# EAGLE board F7_250x185 (EAGLE 6.1)
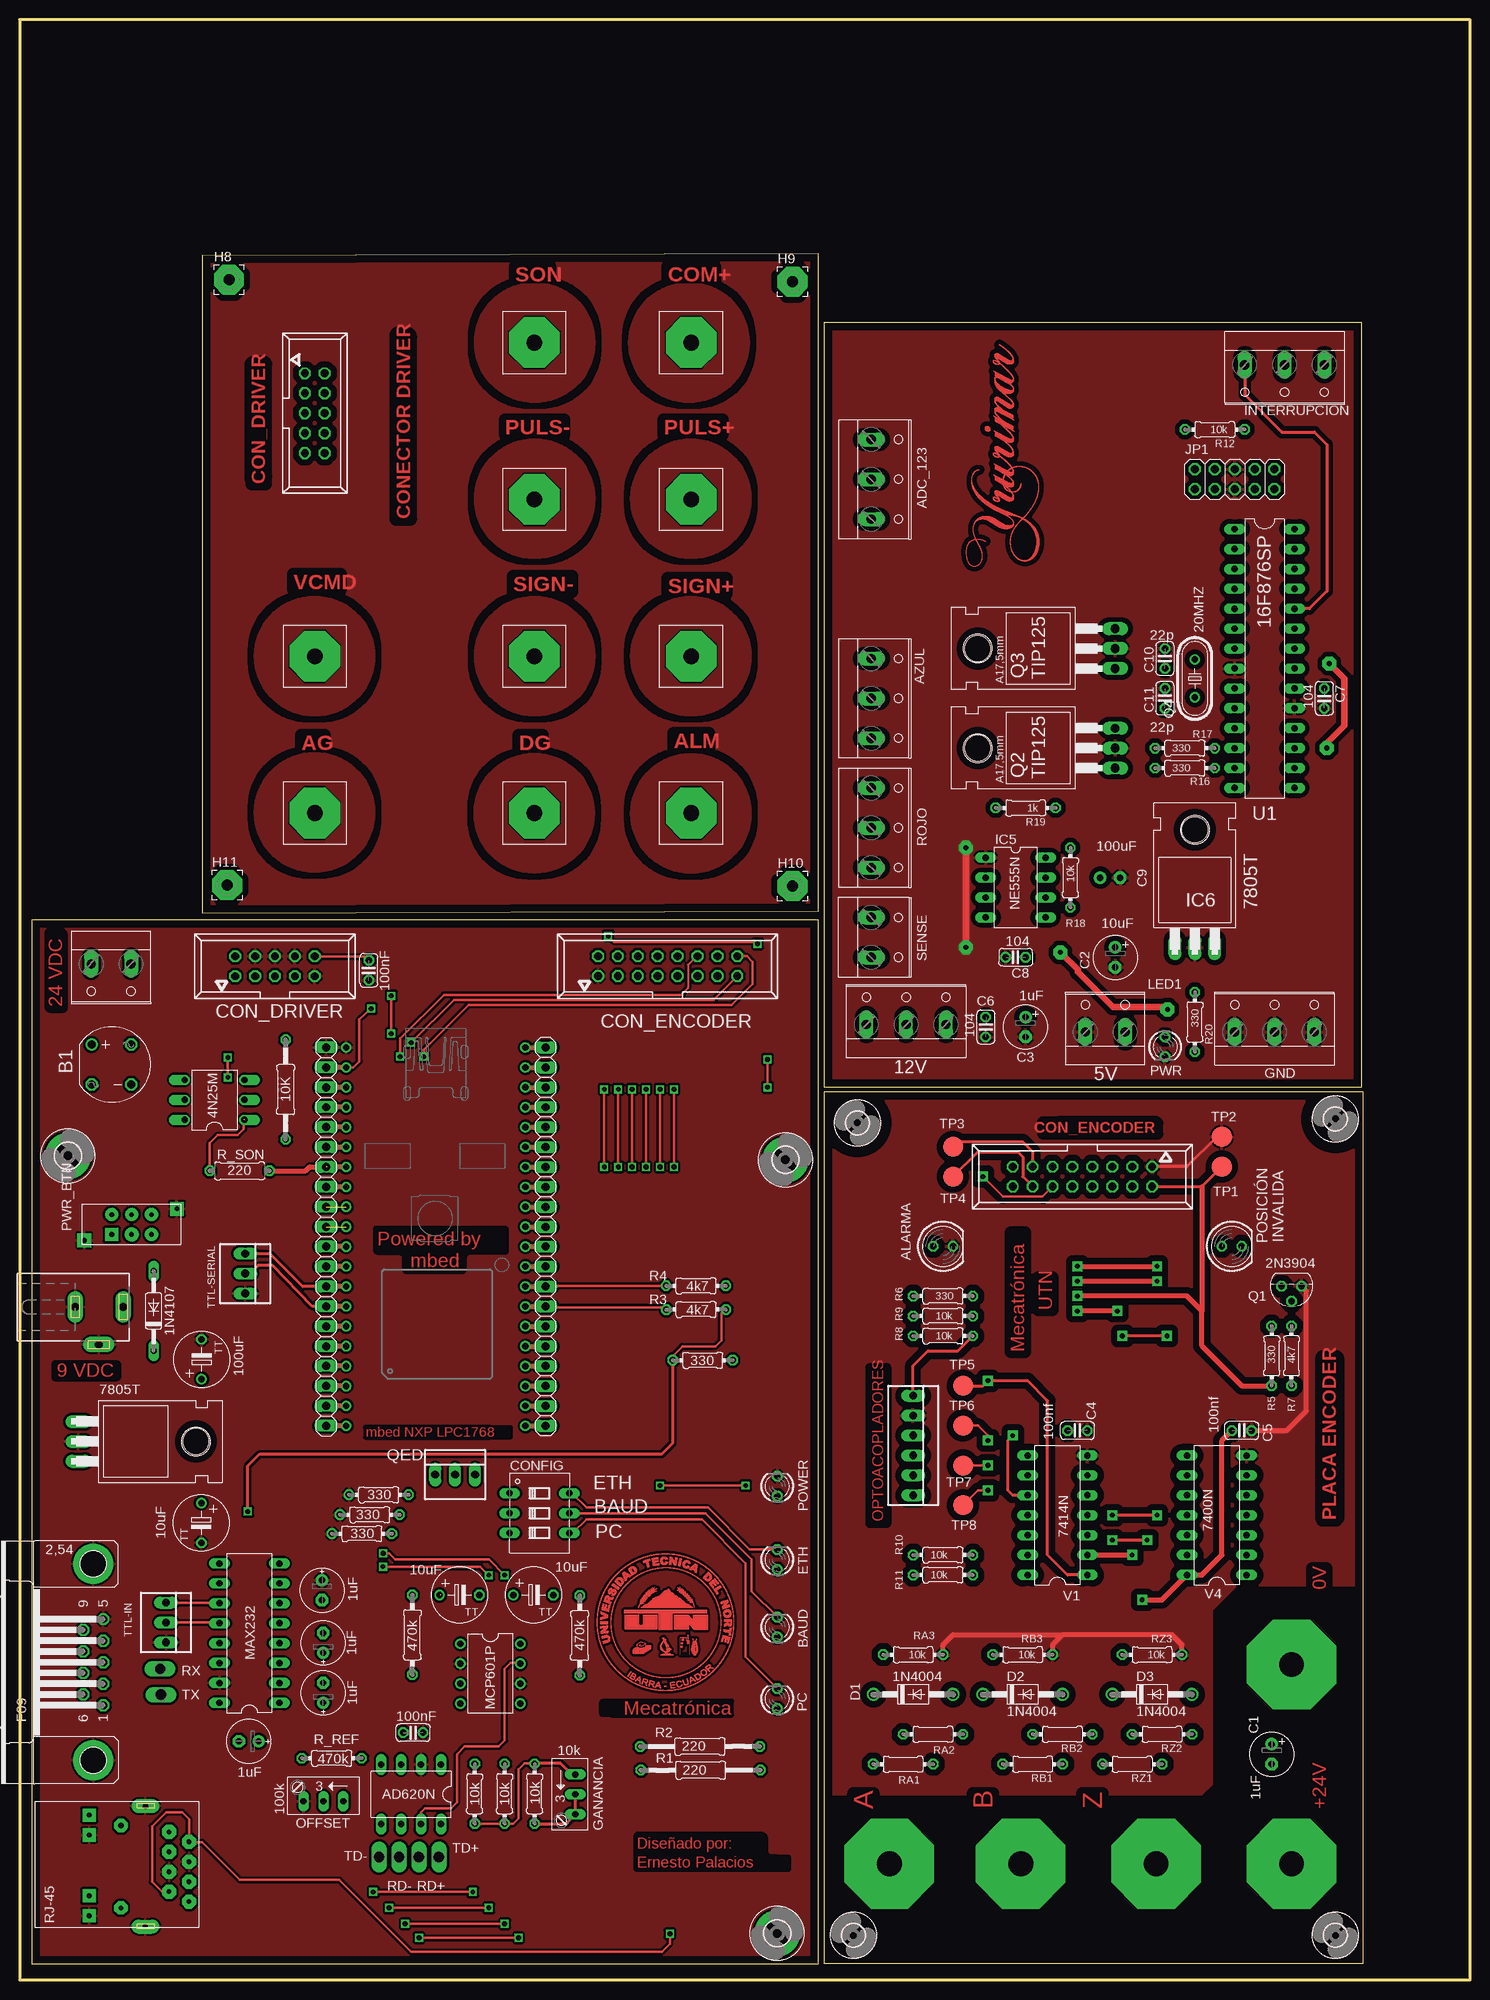
[diagram p0: board, top side]
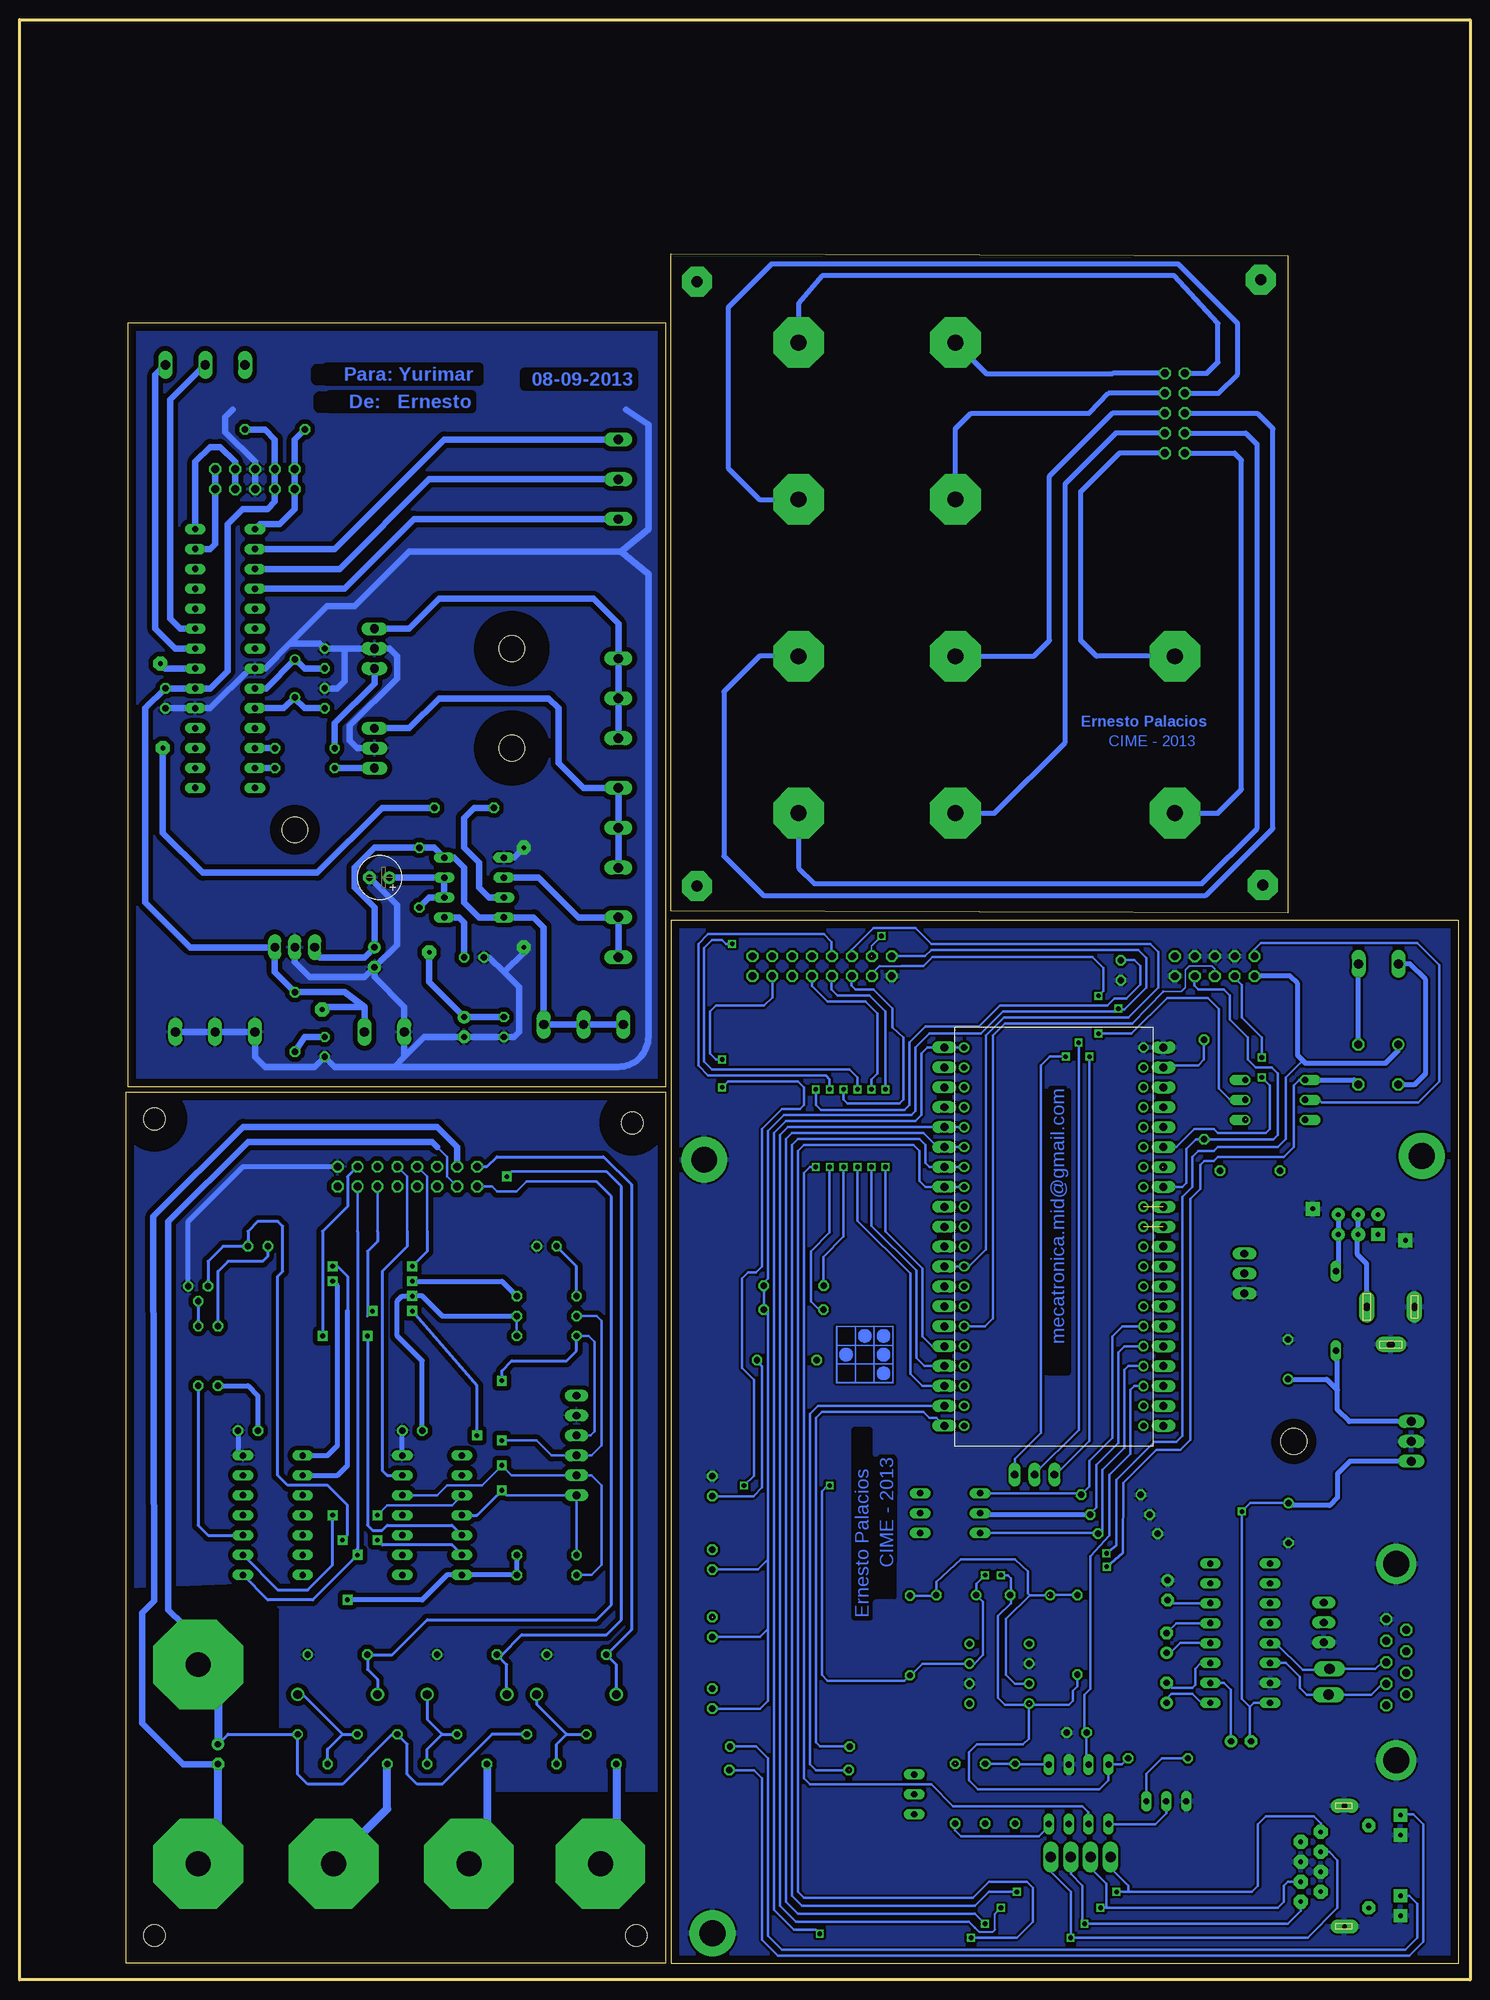
[diagram p1: board, bottom side, seen from below]

Size 185 x 250 mm. Coordinates in mm from the lower left corner, seen from the top.
Outline: 0,0 185,0 185,250 0,250 0,0
Outline: 1.54,2.05 101.87,2.05 101.87,135.15 1.54,135.15 1.54,2.05
Outline: 171.37,2.11 171.37,113.22 102.61,113.22 102.61,2.11 171.37,2.11
Outline: 23.27,136.06 101.89,136.31 101.89,220.13 23.27,219.88 23.27,136.06
Outline: 171.17,113.91 171.17,211.36 102.6,211.36 102.6,113.91 171.17,113.91
Copper layers (1*16): Top 0.035mm / dielectric 1.5mm / Bottom 0.035mm
Design rules: minimum track width 10mil, minimum drill 24mil, track to track 8mil, track to pad 8mil, pad to pad 8mil, via to via 8mil, smd to smd 8mil, copper to edge 40mil, drill to drill 8mil, minimum pad ring 10mil, minimum via ring 8mil, stop-mask expansion 4mil, vias tented up to drill 0mil, thermal gap 10mil
Net classes: 1 fuente_24: width 0.406 mm, clearance 0.305 mm; 3 fuente_5v: width 0.356 mm; 4 tierra_5v: width 0.356 mm
Milling: 8 lines

## Footprints (pad centres in the part's own frame; a part is rotated, then mirrored left to right if it is on the bottom)
BANA_PLUG = drill 3.175 pad 11.43 octagon: P$1 0,0
DCJ0303 = drill 1 pad 2 long: 1 0,3.1; 2 4.8,0; 3 0,-3
W237-133 = drill 1.194 long: 1 -5.08,-0.635; 2 0,-0.635; 3 5.08,-0.635
W237-132 = drill 1.194 long: 1 -2.54,-0.635; 2 2.54,-0.635
BANANA = drill 2 pad 6.452 octagon: BANANA$1 0,0
LED5MM = drill 0.813 octagon: A -1.27,0; K 1.27,0
RB1A = drill 1.016: + -2.54,2.54 | drill 1.016 octagon: - 2.54,-2.54; AC1 2.54,2.54; AC2 -2.54,-2.54
LED3MM = drill 0.813 octagon: A -1.27,0; K 1.27,0
E2,5-6 = drill 0.813 pad 1.6: + -1.27,0 | drill 0.813 pad 1.6 octagon: - 1.27,0
TT5D7 = drill 0.813: + -2.54,0 | drill 0.813 octagon: - 2.54,0
E2,5-6E = drill 0.813 pad 1.575: + -1.27,0 | drill 0.813 pad 1.575 octagon: - 1.27,0
C025-024X044 = drill 0.813 octagon: 1 -1.27,0; 2 1.27,0
057-010-1 = drill 1 octagon: 1 -5.08,-1.27; 2 -5.08,1.27; 3 -2.54,-1.27; 4 -2.54,1.27; 5 0,-1.27; 6 0,1.27; 7 2.54,-1.27; 8 2.54,1.27; 9 5.08,-1.27; 10 5.08,1.27
057-016-1 = drill 1 octagon: 1 -8.89,-1.27; 2 -8.89,1.27; 3 -6.35,-1.27; 4 -6.35,1.27; 5 -3.81,-1.27; 6 -3.81,1.27; 7 -1.27,-1.27; 8 -1.27,1.27; 9 1.27,-1.27; 10 1.27,1.27; 11 3.81,-1.27; 12 3.81,1.27; 13 6.35,-1.27; 14 6.35,1.27; 15 8.89,-1.27; 16 8.89,1.27
DIP03YL = drill 0.813 long: 1 -2.54,-3.81; 2 0,-3.81; 3 2.54,-3.81; 4 2.54,3.81; 5 0,3.81; 6 -2.54,3.81
DO41-10 = drill 1.118: A 5.08,0; C -5.08,0
DO35-10 = drill 0.813 long: A 5.08,0; C -5.08,0
RJ9W = drill 0.813 long: A 2.54,0.635; E -2.54,0.635; S 0,0.635
3,3-PAD = drill 3.3 pad 5.842: B3,3 0,0
2,8 = hole 2.8: 0,0
3,81/1,4 = drill 1.397 pad 3.81 octagon: 1 0,0
DIL16 = drill 0.813 long: 1 -8.89,-3.81; 2 -6.35,-3.81; 3 -3.81,-3.81; 4 -1.27,-3.81; 5 1.27,-3.81; 6 3.81,-3.81; 7 6.35,-3.81; 8 8.89,-3.81; 9 8.89,3.81; 10 6.35,3.81; 11 3.81,3.81; 12 1.27,3.81; 13 -1.27,3.81; 14 -3.81,3.81; 15 -6.35,3.81; 16 -8.89,3.81
TO220H = drill 1.118 long: 1 -2.54,-10.16; 2 0,-10.16; 3 2.54,-10.16 | hole 3.302: 0,4.826
DIL08 = drill 0.813 pad 1.27: 1 -3.81,-3.81; 2 -1.27,-3.81; 3 1.27,-3.81; 4 3.81,-3.81; 5 3.81,3.81; 6 1.27,3.81; 7 -1.27,3.81; 8 -3.81,3.81
DIL08' = drill 0.813 long: 1 -3.81,-3.81; 2 -1.27,-3.81; 3 1.27,-3.81; 4 3.81,-3.81; 5 3.81,3.81; 6 1.27,3.81; 7 -1.27,3.81; 8 -3.81,3.81
2X05 = drill 1.016 octagon: 1 -5.08,-1.27; 2 -5.08,1.27; 3 -2.54,-1.27; 4 -2.54,1.27; 5 0,-1.27; 6 0,1.27; 7 2.54,-1.27; 8 2.54,1.27; 9 5.08,-1.27; 10 5.08,1.27
1X20 = drill 1.016 long: 1 -24.13,0; 2 -21.59,0; 3 -19.05,0; 4 -16.51,0; 5 -13.97,0; 6 -11.43,0; 7 -8.89,0; 8 -6.35,0; 9 -3.81,0; 10 -1.27,0; 11 1.27,0; 12 3.81,0; 13 6.35,0; 14 8.89,0; 15 11.43,0; 16 13.97,0; 17 16.51,0; 18 19.05,0; 19 21.59,0; 20 24.13,0
MBED-KIT = drill 0.8: D+ 11.43,1.27; D- 11.43,3.81; GND -11.43,24.13; IF+ 11.43,16.51; IF- 11.43,19.05; NR -11.43,16.51; P$5 -11.43,13.97; P$6 -11.43,11.43; P$7 -11.43,8.89; P$8 -11.43,6.35; P$9 -11.43,3.81; P$10 -11.43,1.27; P$11 -11.43,-1.27; P$12 -11.43,-3.81; P$13 -11.43,-6.35; P$14 -11.43,-8.89; P$15 -11.43,-11.43; P$16 -11.43,-13.97; P$17 -11.43,-16.51; P$18 -11.43,-19.05; P$19 -11.43,-21.59; P$20 -11.43,-24.13; P$21 11.43,-24.13; P$22 11.43,-21.59; P$23 11.43,-19.05; P$24 11.43,-16.51; P$25 11.43,-13.97; P$26 11.43,-11.43; P$27 11.43,-8.89; P$28 11.43,-6.35; P$29 11.43,-3.81; P$30 11.43,-1.27; RD+ 11.43,11.43; RD- 11.43,13.97; TD+ 11.43,6.35; TD- 11.43,8.89; VB -11.43,19.05; VIN -11.43,21.59; VOUT 11.43,24.13; VU 11.43,21.59
DIL06 = drill 0.813 offset: 1 -2.54,-3.81; 2 0,-3.81; 3 2.54,-3.81; 4 2.54,3.81; 5 0,3.81; 6 -2.54,3.81
BOTON_ENCNEDIDO = drill 0.6 pad 1.778 square: G1 -2.019,6.039; G2 2.018,-5.785 | drill 0.6 pad 1.676 square: P1 -1.27,2.54 | drill 0.6 pad 1.778: P2 -1.27,0 | drill 0.6 pad 1.676: P3 -1.27,-2.54; P4 1.27,-2.54; P5 1.27,0; P6 1.27,2.54
22-23-2061 = drill 1 long: 1 -6.35,0; 2 -3.81,0; 3 -1.27,0; 4 1.27,0; 5 3.81,0; 6 6.35,0
0204/7 = drill 0.813 octagon: 1 -3.81,0; 2 3.81,0
TO92 = drill 0.813 octagon: 1 1.27,0; 2 0,1.905; 3 -1.27,0
TO220 = drill 1.118 long: 1 -2.54,-6.35; 2 0,-6.35; 3 2.54,-6.35 | hole 3.302: 0,11.176
HC49/S = drill 0.813: 1 -2.413,0; 2 2.413,0
22-23-2031 = drill 1 long: 1 -2.54,0; 2 0,0; 3 2.54,0
0207/15 = drill 0.813 octagon: 1 -7.62,0; 2 7.62,0
0207/10 = drill 0.813 octagon: 1 -5.08,0; 2 5.08,0
0207/12 = drill 0.813 octagon: 1 -6.35,0; 2 6.35,0
0207/7 = drill 0.813 octagon: 1 -3.81,0; 2 3.81,0
P1-13Y = drill 1.321 pad 1.905 long: TP 0,0
B2,54 = smd 2.54 x 2.54: TP 0,0
DIL28-3 = drill 0.813 long: 1 -16.51,-3.81; 2 -13.97,-3.81; 3 -11.43,-3.81; 4 -8.89,-3.81; 5 -6.35,-3.81; 6 -3.81,-3.81; 7 -1.27,-3.81; 8 1.27,-3.81; 9 3.81,-3.81; 10 6.35,-3.81; 11 8.89,-3.81; 12 11.43,-3.81; 13 13.97,-3.81; 14 16.51,-3.81; 15 16.51,3.81; 16 13.97,3.81; 17 11.43,3.81; 18 8.89,3.81; 19 6.35,3.81; 20 3.81,3.81; 21 1.27,3.81; 22 -1.27,3.81; 23 -3.81,3.81; 24 -6.35,3.81; 25 -8.89,3.81; 26 -11.43,3.81; 27 -13.97,3.81; 28 -16.51,3.81
RJ45-GENERIC = drill 0.6 pad 1.778 octagon: P1 12.2,19.685; P2 10.93,17.145; P3 9.66,19.685; P4 8.39,17.145; P5 7.12,19.685; P6 5.85,17.145; P7 4.58,19.685; P8 3.31,17.145 | drill 0.6 pad 1.676 square: PAAMA 1.17,6.958; PAV 11.465,6.958; PKAM 3.71,6.958; PKV 14.005,6.958 | drill 0.6 pad 1.778 long: PSHIEL2 15.375,14.105 | drill 0.7 pad 1.778 long: PSHIELD1 0,14.105 | drill 0.7 pad 1.676 octagon: PSTAND 2.5,11.008 | drill 0.6 pad 1.676 octagon: PSTAND2 13,11.008
DIL14 = drill 0.813 long: 1 -7.62,-3.81; 2 -5.08,-3.81; 3 -2.54,-3.81; 4 0,-3.81; 5 2.54,-3.81; 6 5.08,-3.81; 7 7.62,-3.81; 8 7.62,3.81; 9 5.08,3.81; 10 2.54,3.81; 11 0,3.81; 12 -2.54,3.81; 13 -5.08,3.81; 14 -7.62,3.81
F09HP = drill 1.016 octagon: 1 -5.486,-1.27; 2 -2.743,-1.27; 3 0,-1.27; 4 2.743,-1.27; 5 5.486,-1.27; 6 -4.115,1.27; 7 -1.372,1.27; 8 1.372,1.27; 9 4.115,1.27 | drill 3.302 pad 5.08: G1 -12.522,0; G2 12.522,0

## Placement (x,y rotation side)
0V  BANA-PCBOARD-CONNECTOR  [BANA_PLUG]  162.23,40.21 90 top
9VDC  [DCJ0303]  10.1,85.82 270 top
12V  [W237-133]  113.07,122.48 0 top
24  BANA-PCBOARD-CONNECTOR  [BANA_PLUG]  162.23,14.81 90 top
24V  [W237-132]  11.67,128.93 180 top
A  BANA-PCBOARD-CONNECTOR  [BANA_PLUG]  110.92,14.81 90 top
ADC_123  [W237-133]  109.26,191.38 270 top
AG  BANANA  [BANANA]  37.65,148.81 0 top
ALARMA  [LED5MM]  117.78,93.55 0 top
ALM  BANANA  [BANANA]  85.65,148.81 0 top
AZUL  [W237-133]  109.26,163.44 270 top
B  BANA-PCBOARD-CONNECTOR  [BANA_PLUG]  127.68,14.81 90 top
B1  [RB1A]  11.72,116.75 0 top
BAUD  [LED3MM]  96.65,45 90 top
C1  1uF  [E2,5-6]  159.69,28.78 270 top
C1_9V  100uF  [TT5D7]  23.21,79.15 90 top
C1_+24  10uF  [TT5D7]  65.53,49.09 0 top
C1_MAX  1uF  [E2,5-6E]  38.71,36.61 90 top
C2  10uF  [E2,5-6]  139.74,130.42 270 top
C2_0V  10uF  [TT5D7]  56.1,49.08 0 top
C2_9V  10uF  [TT5D7]  23.18,58.28 270 top
C2_MAX  1uF  [E2,5-6E]  38.71,42.98 90 top
C3  1uF  [E2,5-6]  128.31,121.53 270 top
C3_AOUT  100nF  [C025-024X044]  44.54,128.76 270 top
C3_MAX  1uF  [E2,5-6E]  38.56,49.69 270 top
C4  100nf  [C025-024X044]  134.92,70.06 0 top
C4_MAX  1uF  [E2,5-6E]  29.23,30.42 180 top
C5  100nf  [C025-024X044]  155.88,70.06 0 top
C5_AOUT  100nF  [C025-024X044]  50.2,31.54 0 top
C6  104  [C025-024X044]  123.23,121.53 270 top
C7  104  [C025-024X044]  166.41,163.44 270 top
C8  104  [C025-024X044]  127.04,130.42 180 top
C9  100uF  [E2,5-6]  139.1,140.58 180 bottom
C10  22p  [C025-024X044]  146.09,168.52 90 top
C11  22p  [C025-024X044]  146.09,163.44 90 top
COM+  BANANA  [BANANA]  85.65,208.81 0 top
CON_DRIVER  057-010-1  [057-010-1]  32.57,129.28 0 top
CON_DRIVER1  057-010-1  [057-010-1]  37.65,199.81 270 top
CON_ENCODER  057-016-1  [057-016-1]  82.65,129.28 0 top
CON_ENCODER1  057-016-1  [057-016-1]  135.56,102.44 180 top
CONFIG  [DIP03YL]  66.31,59.53 270 top
D1  1N4004  [DO41-10]  113.97,36.4 0 top
D1_INPUT  1N4107  [DO35-10]  17.1,85.31 90 top
D2  1N4004  [DO41-10]  127.94,36.4 0 top
D3  1N4004  [DO41-10]  144.45,36.4 0 top
DG  BANANA  [BANANA]  65.65,148.81 0 top
ERROR_POSICION  [LED5MM]  154.61,93.55 0 top
ETH  [LED3MM]  96.65,53.62 90 top
GANANCIA  10k  [RJ9W]  70.25,23.67 270 top
GND  [W237-133]  160.06,121.53 0 top
H1  MOUNT-HOLE2.8  [3,3-PAD]  97.68,104.6 0 top
H2  MOUNT-HOLE2.8  [3,3-PAD]  6.17,105.1 0 top
H3  MOUNT-HOLE2.8  [3,3-PAD]  96.62,5.93 0 top
H4  MOUNT-HOLE2.8  [2,8]  167.82,5.67 90 top
H5  MOUNT-HOLE2.8  [2,8]  106.35,5.67 90 top
H6  MOUNT-HOLE2.8  [2,8]  106.86,109.3 90 top
H7  MOUNT-HOLE2.8  [2,8]  167.82,109.81 90 top
H8  [3,81/1,4]  26.7,216.83 0 top
H9  [3,81/1,4]  98.59,216.57 0 top
H10  [3,81/1,4]  98.59,139.48 0 top
H11  [3,81/1,4]  26.45,139.61 0 top
IC1  MAX232  [DIL16]  29.31,44.22 90 top
IC2  7805T  [TO220H]  17.66,68.67 270 top
IC3  MCP601P  [DIL08]  60.04,39.05 270 top
IC4  AD620N  [DIL08']  49.93,23.67 180 top
IC5  NE555N  [DIL08']  127.04,139.31 270 top
IC6  7805T  [TO220H]  149.9,141.85 0 top
INTERRUPCION  [W237-133]  161.33,205.35 180 top
JP1  [2X05]  154.98,191.38 0 top
JP_LEFT  [1X20]  39.12,94.79 90 top
JP_RIGHT  [1X20]  67.06,94.79 270 top
KIT1  MBED_NXP_LPC1768  [MBED-KIT]  53.09,94.79 0 top
LED1  [LED3MM]  146.09,118.99 270 top
OFFSET  100k  [RJ9W]  38.75,23.41 180 top
OK1  4N25M  [DIL06]  24.86,112.23 90 top
ON/OFF  BOTON_ENCENDIDO  [BOTON_ENCNEDIDO]  14.28,96.33 90 top
OPTO-ACOPLADOR1  [22-23-2061]  113.97,68.15 270 top
PC  [LED3MM]  96.65,35.88 90 top
POWER  [LED3MM]  96.65,62.97 90 top
PULS+  BANANA  [BANANA]  85.65,188.81 0 top
PULS-  BANANA  [BANANA]  65.65,188.81 0 top
PWR  [W237-132]  138.47,121.53 0 top
PWR_LED_R  330  [0204/7]  87.13,79.03 0 top
Q1  2N3904  [TO92]  162.23,88.47 180 top
Q2  TIP125  [TO220]  133.39,157.09 90 top
Q3  TIP125  [TO220]  133.39,169.79 90 top
Q4  20MHZ  [HC49/S]  149.9,165.98 90 top
QED  22-23-2031  [22-23-2031]  55.54,64.45 0 top
R1  220  [0207/15]  86.87,26.75 0 top
R1_DIV  470k  [0207/10]  71.44,43.91 90 top
R1_G  10k  [0204/7]  61.86,23.75 270 top
R2  220  [0207/15]  86.77,29.76 0 top
R2_DIV  470k  [0207/10]  50.09,44.01 270 top
R2_G  10k  [0204/7]  65.68,23.75 270 top
R3  4k7  [0204/7]  86.28,85.49 0 top
R3_G  10k  [0204/7]  58.05,23.75 270 top
R4  4k7  [0204/7]  86.26,88.52 0 top
R5  330  [0204/7]  159.69,79.58 90 top
R6  330  [0204/7]  117.78,87.2 0 top
R7  4k7  [0204/7]  162.23,79.58 90 top
R8  10k  [0204/7]  117.78,82.12 0 top
R9  10k  [0204/7]  117.78,84.66 0 top
R10  10k  [0204/7]  117.78,54.18 0 top
R11  10k  [0204/7]  117.78,51.64 0 top
R12  10k  [0204/7]  152.44,197.73 180 top
R13  330  [0204/7]  43.65,56.91 0 top
R14  330  [0204/7]  44.67,59.33 0 top
R15  330  [0204/7]  45.81,61.87 0 top
R16  330  [0204/7]  148.63,154.55 0 top
R16_ALM  10K  [0207/12]  33.93,113.54 90 top
R17  330  [0204/7]  148.63,157.09 0 top
R18  10k  [0204/7]  134.02,140.58 270 top
R19  1k  [0204/7]  128.31,149.47 180 top
R20  330  [0204/7]  149.9,122.16 270 top
R_REF  470k  [0204/7]  39.81,28.26 0 top
R_SON  220  [0207/7]  28.07,103.19 180 top
RA1  2k  [0204/7]  112.7,27.51 180 top
RA2  3k3  [0204/7]  116.51,31.32 180 top
RA3  10k  [0204/7]  113.97,41.48 180 top
RB1  2k  [0204/7]  129.21,27.51 180 top
RB2  3k3  [0204/7]  133.02,31.32 180 top
RB3  10k  [0204/7]  127.94,41.48 180 top
RD+  PTR1PAD1-13Y  [P1-13Y]  50.94,15.66 180 top
RD-  PTR1PAD1-13Y  [P1-13Y]  48.4,15.66 180 top
ROJO  [W237-133]  109.26,146.93 270 top
RX  PTR1PAD1-13Y  [P1-13Y]  17.92,39.67 90 top
RZ1  2k  [0204/7]  141.91,27.51 180 top
RZ2  3k3  [0204/7]  145.72,31.32 180 top
RZ3  10k  [0204/7]  144.45,41.48 180 top
SENSE  [W237-132]  109.26,132.96 270 top
SIGN+  BANANA  [BANANA]  85.65,168.81 0 top
SIGN-  BANANA  [BANANA]  65.65,168.81 0 top
SON  BANANA  [BANANA]  65.65,208.81 0 top
TD+  PTR1PAD1-13Y  [P1-13Y]  53.48,15.66 180 top
TD-  PTR1PAD1-13Y  [P1-13Y]  45.86,15.66 180 top
TP1  TPB2,54  [B2,54]  153.34,103.71 90 top
TP2  TPB2,54  [B2,54]  153.34,107.52 90 top
TP3  TPB2,54  [B2,54]  119.05,106.25 90 top
TP4  TPB2,54  [B2,54]  119.05,102.44 90 top
TP5  TPB2,54  [B2,54]  120.32,75.77 0 top
TP6  TPB2,54  [B2,54]  120.32,70.69 0 top
TP7  TPB2,54  [B2,54]  120.32,65.61 0 top
TP8  TPB2,54  [B2,54]  120.32,60.53 0 top
TTL-IN  22-23-2031  [22-23-2031]  18.67,45.58 270 top
TTL-SERIAL  22-23-2031  [22-23-2031]  28.78,90.08 270 top
TX  PTR1PAD1-13Y  [P1-13Y]  18.05,36.37 90 top
U1  16F876SP  [DIL28-3]  158.79,168.52 270 top
U$1  RJ-45-GENERIC  [RJ45-GENERIC]  1.92,22.18 270 top
V1  7414N  [DIL14]  132.38,59.26 90 top
V4  7400N  [DIL14]  152.7,59.26 90 top
VCMD  BANANA  [BANANA]  37.65,168.81 0 top
X1  [F09HP]  9.41,40.53 90 top
Z  BANA-PCBOARD-CONNECTOR  [BANA_PLUG]  144.96,14.81 90 top

## Library data of the parts
0V 24 A B Z = banana-plug
9VDC = con-jack
12V ADC_123 AZUL GND INTERRUPCION PWR ROJO SENSE = con-wago-508; OC_FARNELL: unknown; OC_NEWARK: unknown
24V = con-wago-508
AG ALM COM+ DG H8-H11 PULS+ PULS- SIGN+ SIGN- SON VCMD = wirepad
ALARMA BAUD ERROR_POSICION ETH LED1 PC POWER = led
B1 = rectifier
C1 C4 C5 R1_DIV R1_G R2_DIV R2_G R3_G R_REF = resistor
C1_9V C1_+24 C1_MAX C2 C2_0V C2_9V C2_MAX C3 C3_AOUT C3_MAX C4_MAX C5_AOUT C6-C11 PWR_LED_R R1-R16 R16_ALM R17-R20 R_SON RA1-RA3 RB1-RB3 RZ1-RZ3 = rcl
CON_DRIVER CON_DRIVER1 CON_ENCODER CON_ENCODER1 = con-panduit; OC_FARNELL: unknown; OC_NEWARK: unknown
CONFIG = switch-dil
D1 D1_INPUT D2 D3 = diode
GANANCIA OFFSET = pot
H1-H7 = holes
IC1 = maxim
IC2 IC3 IC6 = linear
IC4 = analog-devices
IC5 = baiyun
JP1 JP_LEFT JP_RIGHT = pinhead
KIT1 = MBED_v2.1
OK1 = optocoupler
ON/OFF = Boton_Encendido
OPTO-ACOPLADOR1 = con-molex; MF: MOLEX; MPN: 22-23-2061; OC_FARNELL: 1462922; OC_NEWARK: 27C1933
Q1 = -redpic-diode-transistor
Q2 Q3 = transistor-pnp
Q4 = crystal; OC_FARNELL: 1667008; OC_NEWARK: unknown
QED TTL-IN TTL-SERIAL = con-molex; MF: MOLEX; MPN: 22-23-2031; OC_FARNELL: 1462950; OC_NEWARK: 30C0862
RD+ RD- RX TD+ TD- TP1-TP8 TX = testpad
U1 = -redpic-microchip-pic
U$1 = RJ45
V1 V4 = 74ttl-din
X1 = con-subd

## Nets
3.3V: JP_RIGHT.1 KIT1.VOUT U$1.P2 U$1.P7
24V0: B1.- C2_0V.- IC3.4 IC4.4 OK1.4 R2_DIV.2 R_REF.2
24V1: B1.+ C1_+24.+ CON_DRIVER.1 CON_ENCODER.13 IC3.7 IC4.7 R1_DIV.1
24V2: CON_ENCODER.14
AG: AG.BANANA$1 CON_DRIVER1.9
ALARMA: R6.2 V4.8
ALM: CON_DRIVER.7 JP_LEFT.13 KIT1.P$8 R16_ALM.1
ALM1: ALM.BANANA$1 CON_DRIVER1.7
COM+: COM+.BANANA$1 CON_DRIVER1.1
CONFIG0: CONFIG.1 JP_LEFT.6 KIT1.P$15 R15.2
CONFIG1: CONFIG.2 JP_LEFT.5 KIT1.P$16 R14.2
CONFIG2: CONFIG.3 JP_LEFT.4 KIT1.P$17 R13.2
DG: CON_DRIVER1.8 DG.BANANA$1
EMERG: ERROR_POSICION.K Q1.1 V1.13
EMERGENCIA: R7.1 V4.3
ENC1: CON_ENCODER1.10
ENC2: CON_ENCODER1.11
ENC4: CON_ENCODER.4 JP_RIGHT.18 KIT1.P$23
ENC6: CON_ENCODER.6 JP_RIGHT.12 KIT1.P$29
ENC7: CON_ENCODER.7 JP_RIGHT.16 KIT1.P$25
ENC9: CON_ENCODER.9 JP_RIGHT.17 KIT1.P$24
ENC10: CON_ENCODER.10
ENC11: CON_ENCODER.11
ETH_LED_AMARILLO: JP_RIGHT.19 KIT1.P$22 R1.1
ETH_LED_VERDE: JP_RIGHT.20 KIT1.P$21 R2.1
GND: 9VDC.2 9VDC.3 C1_9V.- C2_9V.- C3_AOUT.2 C3_MAX.+ C5_AOUT.2 CON_DRIVER.4 CON_DRIVER.6 CON_DRIVER.8 CON_DRIVER.9 CON_ENCODER.1 H1.B3,3 H3.B3,3 IC1.15 IC2.2 IC3.2 IC3.6 IC4.2 JP_LEFT.20 KIT1.GND OFFSET.A ON/OFF.G1 ON/OFF.G2 POWER.K R13.1 R14.1 R15.1 TTL-IN.3 TTL-SERIAL.3 U$1.P4 U$1.P5 U$1.PKAM U$1.PKV U$1.PSHIEL2 U$1.PSHIELD1 X1.5 X1.G1 X1.G2
GND1 [tierra_5v]: ALARMA.K C4.2 C5.2 CON_ENCODER1.1 OPTO-ACOPLADOR1.2 Q1.3 RA3.1 RB3.1 RZ3.1 TP2.TP V1.7 V4.7
GND2: 0V.P$1 C1.+ CON_ENCODER1.14 RA2.1 RB2.1 RZ2.1 TP4.TP
GND3: C2.- C3.- C6.2 C7.2 C8.2 C9.- C10.2 C11.2 GND.1 GND.2 GND.3 IC5.1 IC6.2 JP1.5 JP1.6 LED1.K PWR.1 Q2.2 Q3.2 U1.8 U1.19
INDEX: CON_ENCODER.16 QED.3
INDEX1: CON_ENCODER1.16 D3.C RZ3.2
LIM2: CON_ENCODER1.9 V4.9
LIM3: V4.10
LIM_1: CON_ENCODER1.4 V1.2 V4.1
LIM_2: V1.4
LIM_3: CON_ENCODER1.7 V1.6
LIM_4: CON_ENCODER1.6 V1.10 V4.2
MAX_R1: IC1.12 TTL-IN.2
MAX_RX: IC1.13 RX.TP X1.3
MAX_T1: IC1.11 TTL-IN.1
MAX_TX: IC1.14 TX.TP X1.2
MBED_RX: JP_LEFT.7 KIT1.P$14 TTL-SERIAL.2
MBED_TX: JP_LEFT.8 KIT1.P$13 TTL-SERIAL.1
MBED_VOUT: C5_AOUT.1 IC4.3 JP_LEFT.3 KIT1.P$18
MCLR: JP1.1 JP1.2 R12.2 U1.1
N$1: 24V.1 B1.AC1
N$2: 24V.2 B1.AC2
N$3: C1_+24.- C2_0V.+ IC3.3 R1_DIV.2 R2_DIV.1
N$4: JP_LEFT.12 KIT1.P$9
N$5: JP_RIGHT.2 KIT1.VU
N$6: JP_LEFT.11 KIT1.P$10
N$7: JP_RIGHT.3 KIT1.IF-
N$8: OFFSET.E R_REF.1
N$9: IC4.1 R1_G.1 R3_G.1
N$10: GANANCIA.E R1_G.2 R2_G.1 R3_G.2
N$11: GANANCIA.A GANANCIA.S IC4.8 R2_G.2
N$12: D1_INPUT.A ON/OFF.P3 ON/OFF.P4
N$13: D1.A RA1.1 RA2.2
N$14: JP_RIGHT.4 KIT1.IF+
N$15: IC4.5 OFFSET.S
N$16: JP_RIGHT.11 KIT1.P$30
N$18: 9VDC.1 ON/OFF.P2 ON/OFF.P5
N$20: OK1.1 R_SON.2
N$21: C1_9V.+ D1_INPUT.C IC2.1
N$24: CONFIG.6 ETH.K
N$25: BAUD.K CONFIG.5
N$26: CONFIG.4 PC.K
N$31: JP_RIGHT.9 KIT1.D-
N$32: JP_RIGHT.10 KIT1.D+
N$33: C1_MAX.+ IC1.1
N$34: C1_MAX.- IC1.3
N$35: C2_MAX.- IC1.5
N$36: C2_MAX.+ IC1.4
N$37: C4_MAX.+ IC1.2
N$38: C3_MAX.- IC1.6
N$44: D2.A RB1.1 RB2.2
N$45: B.P$1 RB1.2
N$46: R1.2 U$1.PAAMA
N$47: A.P$1 RA1.2
N$48: JP_LEFT.18 KIT1.VB
N$49: JP_LEFT.17 KIT1.NR
N$50: JP_LEFT.16 KIT1.P$5
N$51: RZ1.2 Z.P$1
N$52: R2.2 U$1.PAV
N$53: JP_LEFT.10 KIT1.P$11
N$54: JP_LEFT.9 KIT1.P$12
N$55: D3.A RZ1.1 RZ2.2
N$56: Q1.2 R7.2
N$57: ERROR_POSICION.A R5.2
N$58: ALARMA.A R6.1
N$59: JP_LEFT.2 KIT1.P$19
N$60: JP_LEFT.1 KIT1.P$20
N$61: POWER.A PWR_LED_R.2
N$79: C8.1 IC5.5
N$80: C9.+ IC5.6 IC5.7 R18.2
N$81: IC5.3 R19.2
N$82: R19.1 U1.21
N$83: IC5.2 SENSE.1 SENSE.2
N$84: R16.2 U1.13
N$85: Q2.1 R16.1
N$86: R17.2 U1.12
N$87: Q3.1 R17.1
N$88: INTERRUPCION.2 U1.23
N$89: ADC_123.1 U1.2
N$90: ADC_123.2 U1.3
N$91: ADC_123.3 U1.4
N$92: C10.1 Q4.2 U1.9
N$93: C11.1 Q4.1 U1.10
N$94: INTERRUPCION.1 U1.22
N$95: LED1.A R20.2
N$96: INTERRUPCION.3 U1.24
OPTO_1: OPTO-ACOPLADOR1.3 R8.1 TP5.TP V1.1
OPTO_2: OPTO-ACOPLADOR1.4 R9.1 TP6.TP
OPTO_3: OPTO-ACOPLADOR1.5 R11.1 TP7.TP V1.5
OPTO_4: OPTO-ACOPLADOR1.6 R10.1 TP8.TP V1.11
OPTP_2: V1.3
PH_A: CON_ENCODER.15 QED.2
PH_A1: CON_ENCODER1.15 D1.C RA3.2
PH_B: CON_ENCODER.12 QED.1
PH_B1: CON_ENCODER1.12 D2.C RB3.2
PULS+: CON_DRIVER.3 JP_LEFT.15 KIT1.P$6
PULS+1: CON_DRIVER1.3 PULS+.BANANA$1
PULS-: CON_DRIVER1.4 PULS-.BANANA$1
PWM_AZUL: AZUL.1 AZUL.2 AZUL.3 Q3.3
PWM_ROJO: Q2.3 ROJO.1 ROJO.2 ROJO.3
RB6: JP1.9 JP1.10 U1.27
RB7: JP1.7 JP1.8 U1.28
RD+: JP_RIGHT.6 KIT1.RD+ RD+.TP U$1.P1
RD-: JP_RIGHT.5 KIT1.RD- RD-.TP U$1.P3
SCL: CON_ENCODER.8 JP_RIGHT.14 KIT1.P$27 R3.1
SCL1: CON_ENCODER1.8
SDA: CON_ENCODER.5 JP_RIGHT.13 KIT1.P$28 R4.1
SDA1: CON_ENCODER1.5
SERVO_ON: JP_LEFT.14 KIT1.P$7 R_SON.1
SIGN+: CON_DRIVER.5 JP_RIGHT.15 KIT1.P$26
SIGN+1: CON_DRIVER1.5 SIGN+.BANANA$1
SIGN-: CON_DRIVER1.6 SIGN-.BANANA$1
SON: CON_DRIVER.2 OK1.5
SON1: CON_DRIVER1.2 SON.BANANA$1
SON_ON: CON_ENCODER.3 OK1.2
SON_ON1: CON_ENCODER1.3 V1.12
TD+: JP_RIGHT.8 KIT1.TD+ TD+.TP U$1.P6
TD-: JP_RIGHT.7 KIT1.TD- TD-.TP U$1.P8
VCC: BAUD.A C2_9V.+ C4_MAX.- CON_ENCODER.2 ETH.A IC1.16 IC2.3 JP_LEFT.19 KIT1.VIN PC.A PWR_LED_R.1 R3.2 R4.2 R16_ALM.2
VCC1 [fuente_5v]: C4.1 C5.1 CON_ENCODER1.2 OPTO-ACOPLADOR1.1 R5.1 R8.2 R9.2 R10.2 R11.2 TP1.TP V1.14 V4.14
VCC2: C3.+ C6.1 C7.1 IC6.3 JP1.3 JP1.4 PWR.2 R12.1 R20.1 U1.20
VCMD: C3_AOUT.1 CON_DRIVER.10 IC4.6
VCMD1: CON_DRIVER1.10 VCMD.BANANA$1
VDD [fuente_24]: 24.P$1 C1.- CON_ENCODER1.13 TP3.TP
VDD1: 12V.1 12V.2 12V.3 C2.+ IC5.4 IC5.8 IC6.1 R18.1

## Tracks (layer width: path | path; a pad name or v marks a point on that pad's centre or on a via)
3.3V  (via drill 0.6)
  Top 0.305: U$1.P2 19.03,11.22 18.18,11.22 16.91,12.49 16.91,19.6 18.68,21.38 20.72,21.38 21.61,20.49 U$1.P7 21.64,17.57 23.26,17.57 28.08,12.74 40.78,12.74 49.93,3.6 81.93,3.6 82.95,4.62 v82.95,5.88
  Top 0.61: KIT1.VOUT JP_RIGHT.1
  Bottom 0.305: KIT1.VOUT 69.23,118.92 69.99,118.15 69.99,110.28 70.75,109.52 87.27,109.52 88.79,107.99 88.79,8.93 86.25,6.39 83.45,6.39 v82.95,5.88
24V0  (via drill 0.6)  (1 unrouted)
  Top 0.305: v46.35,52.7 58.74,52.7 v59.83,51.6
  Bottom 0.305: OK1.4 21.81,114.77 22.5,114.09 22.5,106.22 23.77,104.94 32.15,104.94 32.66,104.44 33.92,104.44 34.43,103.93 34.43,100.88 35.7,99.61 35.7,68.88 36.97,67.61 40.02,67.61 44.21,63.42 44.26,54.44 v46.35,52.7 | v59.83,51.6 58.94,51.6 58.56,51.22 58.56,49.16 C2_0V.- 58.56,49 58.56,48.05 60.21,46.4 60.21,35.98 59.33,35.09 56.4,35.09 56.28,35.22 | R2_DIV.2 50.09,37.47 50.69,36.87 50.69,35.6 51.2,35.09 56.09,35.09 IC3.4 56.28,35.19 56.28,30.78 57.04,30.02 62.88,30.02 63.9,29 63.9,25.44 62.75,24.3 47.26,24.3 46.12,25.44 IC4.4 44.41,27.48 R_REF.2
  Bottom 0.61: OK1.4 14.82,114.77 B1.-
24V1  (via drill 0.6)
  Top 0.305: v95.39,117.39 v95.39,113.83 | v92.6,63.03 v81.68,63.03 | IC4.7 51.2,21.38 51.7,21.89 55.01,21.89 55.77,22.65 55.77,28.75 56.78,29.76 61.1,29.76 61.87,30.52 61.87,39.67 62.63,40.43 63.74,40.43 IC3.7 | v46.37,54.4 47.11,54.4 47.9,53.61 59.86,53.61 v61.87,51.6
  Bottom 0.305: v61.87,51.6 62.99,50.48 C1_+24.+ 62.12,48.22 62.12,41.45 63.24,40.32 IC3.7 69.85,40.32 71.39,38.78 71.39,38.79 R1_DIV.1 72.13,38.14 81.93,38.14 82.69,38.91 82.69,62.27 81.93,63.03 v81.68,63.03 | v46.37,54.4 45.1,55.41 45.1,63.8 40.27,68.62 37.48,68.62 36.72,69.39 36.72,99.86 35.45,101.14 35.45,104.94 34.69,105.71 32.66,105.71 32.15,106.22 24.53,106.22 23.51,107.23 23.51,115.11 21.35,117.26 | CON_ENCODER.13 89,125.31 90.06,124.25 96.16,124.25 96.92,123.49 96.92,118.15 96.16,117.39 v95.39,117.39 | v95.39,113.83 94.63,114.6 85.74,114.6 84.98,113.83 84.98,111.55 85.49,111.04 87.77,111.04 90.31,108.5 90.31,90.97 91.08,90.21 92.09,90.21 92.85,89.45 92.85,78.02 91.33,76.5 91.33,64.31 v92.6,63.03
  Bottom 0.61: B1.+ 9.18,118.51 10.81,116.88 20.97,116.88 21.35,117.26 21.99,117.9 21.99,127.04 23,128.06 27.43,128.06 CON_DRIVER.1
AG
  Bottom 0.61: CON_DRIVER1.9 30.07,194.73 29.15,193.81 29.15,151.81 32.15,148.81 AG.BANANA$1
ALARMA  (via drill 0.6 pad 1.27)
  Top 0.61: v145.08,89.11 v134.92,89.11
  Bottom 0.61: V4.8 145.72,66.88 144.45,68.15 144.45,88.47 v145.08,89.11 | v134.92,89.11 123.49,89.11 R6.2
ALM
  Top 0.61: KIT1.P$8 JP_LEFT.13
  Bottom 0.305: JP_LEFT.13 36.72,101.14 36.21,101.64 36.21,105.96 34.98,107.19 R16_ALM.1 25.07,107.19 24.53,107.74 24.53,115.61 25.29,116.38 27.32,116.38 28.34,117.39 28.34,120.19 30.62,122.47 30.62,125.52 31.39,126.28 34.69,126.28 35.2,126.79 35.2,127.92 CON_DRIVER.7
ALM1
  Bottom 0.61: CON_DRIVER1.7 28.61,197.27 27.15,195.81 27.15,146.85 34.2,139.8 83.64,139.8 85.65,141.81 ALM.BANANA$1
COM+
  Bottom 0.61: CON_DRIVER1.1 33.57,204.89 32.15,206.31 32.15,211.27 37.7,217.33 82.63,217.33 85.65,213.81 COM+.BANANA$1
CONFIG0
  Top 0.61: KIT1.P$15 JP_LEFT.6
  Bottom 0.305: KIT1.P$15 44.34,83.36 45.61,82.08 45.61,69.13 48.53,66.21 48.53,62.91 49.57,61.87 R15.2 50.05,62.06 CONFIG.1
CONFIG1
  Top 0.61: KIT1.P$16 JP_LEFT.5
  Bottom 0.305: R14.2 48.43,59.45 47.64,60.24 47.64,65.7 44.85,68.5 44.85,80.05 44.09,80.81 KIT1.P$16
  Bottom 0.61: R14.2 62.3,59.33 CONFIG.2
CONFIG2
  Top 0.61: KIT1.P$17 JP_LEFT.4
  Bottom 0.305: KIT1.P$17 43.58,78.28 44.09,77.77 44.09,67.86 46.88,65.07 46.88,57.32 47.29,56.91 R13.2 48.3,56.98 CONFIG.3
DG
  Bottom 0.61: CON_DRIVER1.8 45.19,197.27 51.65,190.81 51.65,157.81 60.65,148.81 DG.BANANA$1
EMERG  (via drill 0.6 pad 1.27)
  Top 0.406: v139.37,56.09 v143.81,56.09
  Bottom 0.406: Q1.1 160.96,91.65 159.05,93.55 ERROR_POSICION.K 155.88,95.46 154.61,96.73 152.07,96.73 151.43,96.09 151.43,90.38 152.07,89.74 152.07,64.34 150.8,63.07 145.72,63.07 143.18,60.53 143.18,56.72 v143.81,56.09 | V1.13 129.84,55.45 138.73,55.45 v139.37,56.09
EMERGENCIA
  Bottom 0.406: R7.1 162.23,57.99 160.96,56.72 V4.3
ENC4  (via drill 0.6)  (1 unrouted)
  Top 0.305: v78.12,103.67 v78.12,113.58 | v94.12,132.12 93.87,132.38 75.83,132.38 v75.07,133.14
  Top 0.61: KIT1.P$23 JP_RIGHT.18
  Bottom 0.203: v75.07,133.14 76.34,131.87 76.34,130.6
  Bottom 0.305: JP_RIGHT.18 69.87,75.73 71.39,77.26 71.39,90.09 78.12,96.82 v78.12,103.67 | v78.12,113.58 78.12,115.11 79.14,116.12 96.66,116.12 97.68,117.14 97.68,131.62 96.66,132.63 95.39,132.63 94.89,132.12 v94.12,132.12
ENC6
  Top 0.61: KIT1.P$29 JP_RIGHT.12
  Bottom 0.305: JP_RIGHT.12 63.9,90.97 61.74,93.13 61.74,120.44 59.45,122.72 43.58,122.72 39.77,126.53 39.77,131.11 40.78,132.12 68.72,132.12 70.75,134.16 76.09,134.16 78.88,131.36 78.88,130.59 CON_ENCODER.6
ENC7  (via drill 0.6)
  Top 0.305: v74.56,103.67 v74.56,113.58
  Top 0.61: KIT1.P$25 JP_RIGHT.16
  Bottom 0.305: JP_RIGHT.16 68.6,80.81 69.87,82.08 69.87,90.72 74.56,95.42 v74.56,103.67 | v74.56,113.58 74.56,123.49 76.6,125.52 80.66,125.52 81.42,126.28 81.42,127.97 CON_ENCODER.7
ENC9  (via drill 0.6)
  Top 0.305: v76.34,103.67 v76.34,113.58
  Top 0.61: KIT1.P$24 JP_RIGHT.17
  Bottom 0.305: JP_RIGHT.17 69.61,78.28 70.63,79.29 70.63,90.47 76.34,96.18 v76.34,103.67 | v76.34,113.58 76.34,114.85 75.58,115.61 75.58,123.23 77.11,124.76 81.93,124.76 83.92,126.75 CON_ENCODER.9
ETH_LED_AMARILLO  (1 unrouted)
  Top 0.61: KIT1.P$22 JP_RIGHT.19
  Bottom 0.305: JP_RIGHT.19 83.2,73.19 84.22,72.18 84.22,27.48 83.45,26.71 79.14,26.71
ETH_LED_VERDE
  Top 0.61: KIT1.P$21 JP_RIGHT.20
  Bottom 0.305: R2.1 82.95,29.76 83.45,30.27 83.45,71.67 82.69,72.43 69.74,72.43 68.98,71.67 68.07,71.67 JP_RIGHT.20
GND
  pour Bottom (isolate 0.305, rank 3): 1.67,23.47 1.67,135.09 101.64,135.02 101.65,135.01 101.63,2.06 1.72,2.21
  pour Top (isolate 0.305): 1.67,2.08 101.74,2.08 101.74,135.17 1.67,135.17
GND1
  Top 0.406: TP2.TP 152.7,107.52 148.89,103.71 CON_ENCODER1.1
  Top 0.61: C5.2 161.59,70.06 164.13,72.6 164.13,87.84 Q1.3 | RZ3.1 148.26,42.75 146.99,44.02 133.02,44.02 | 133.02,44.02 131.75,42.75 RB3.1 | RA3.1 117.78,42.75 119.05,44.02 133.02,44.02
  Bottom 0.61: C5.2 157.15,67.52 V4.7 | Q1.3 163.5,96.73 156.51,103.71 CON_ENCODER1.1 | V1.7 C4.2
  pour Bottom (isolate 0.61, rank 3): 171.37,2.11 171.37,113.24 102.92,113.24 102.92,2.11
  pour Top (isolate 0.813): 102.92,23.7 150.8,23.7 152.07,24.97 152.07,47.2 155.24,50.37 171.37,50.37 171.37,113.24 102.92,113.24
GND2
  Top 0.406: TP4.TP 122.22,105.62 127.3,105.62 127.94,104.98 127.94,102.44 CON_ENCODER1.14
  Bottom 0.305: 131.75,106.25 130.48,104.98 130.48,102.44 CON_ENCODER1.14
  Bottom 0.406: RA2.1 124.76,31.32 131.11,24.97 134.29,24.97 135.56,26.24 135.56,30.05 RB2.1 137.46,31.32 143.81,24.97 148.26,24.97 149.53,26.24 RZ2.1 158.42,31.32 C1.+
  Bottom 0.813: 0V.P$1 162.23,43.51 166.04,47.2 166.04,96.73 155.88,106.89 132.38,106.89 131.75,106.25
  Bottom 1.016: 0V.P$1 159.69,37.42 C1.+
GND3  (via drill 0.6 pad 1.78)
  Top 0.813: v120.69,144.39 v120.69,131.69
  Bottom 0.813: C7.2 U1.19 160.69,162.17 155.61,167.25 U1.8 153.71,167.25 150.53,170.42 | JP1.6 JP1.5 154.98,193.6 158.79,197.41 158.79,199.31 157.84,200.27 | GND.3 GND.2 GND.1 154.98,117.72 153.71,116.45 147.36,116.45 LED1.K 144.82,116.45 137.2,116.45 | 135.93,117.72 PWR.1 135.93,124.07 139.74,127.88 C2.- | IC6.2 149.9,129.78 147.99,127.88 141.01,127.88 C2.- | 135.93,117.72 133.39,120.26 C3.- C6.2 121.96,120.26 121.32,120.89 121.32,126.61 123.23,128.51 | 123.23,128.51 125.13,130.42 C8.2 | IC5.1 121.96,143.12 v120.69,144.39 | v120.69,131.69 120.69,131.05 123.23,128.51 | 150.53,170.42 146.72,170.42 C10.2 143.55,169.79 | 143.55,169.79 Q3.2 137.83,169.79 136.88,168.83 136.88,165.98 142.91,159.94 142.91,158.04 141.96,157.09 Q2.2 | 107.67,200.27 104.81,198.36 104.81,185.03 108.31,182.17 | 108.31,182.17 135.29,182.17 142.28,175.19 145.77,175.19 150.53,170.42 | C11.2 144.5,164.71 143.55,165.66 143.55,169.79 | 135.93,117.72 137.2,116.45 | 137.2,116.45 108.62,116.45 arc-90 104.81,120.26 104.81,179.31 108.31,182.17 | C2.- 136.88,132 136.88,137.08 C9.-
  pour Bottom (isolate 0.61): 171.17,113.91 171.17,211.38 102.59,211.38 102.59,113.91
  pour Top (isolate 0.61): 171.17,113.91 171.17,211.38 102.59,211.38 102.59,113.91
INDEX  (via drill 0.6 pad 1.02)
  Top 0.305: CON_ENCODER.16 92.75,130.55 93.49,129.81 93.49,127.02 90.82,124.35 57.29,124.35 51.58,118.64 v51.58,117.75
  Bottom 0.305: QED.3 58.08,66.41 54.75,69.74 54.75,116.6 53.61,117.75 v51.58,117.75
INDEX1
  Bottom 0.305: CON_ENCODER1.16 124.76,101.17 124.13,100.54 121.59,100.54 120.32,101.81 111.43,101.81
  Bottom 0.406: D3.C 139.37,38.31 140.64,39.58 RZ3.2 137.46,41.48 133.02,45.93 111.43,45.93 109.52,47.83 109.52,99.9 111.43,101.81
LIM2  (via drill 0.6 pad 1.27)
  Top 0.61: v134.92,91.01 v145.08,91.01
  Bottom 0.305: CON_ENCODER1.9 133.02,102.44 133.02,95.46
  Bottom 0.406: 133.02,95.46 133.02,92.92 v134.92,91.01 | v145.08,91.01 144.45,91.01 143.18,89.74 143.18,85.3
  Bottom 0.61: V4.9 144.45,64.34 143.18,65.61 143.18,85.3
LIM_1  (via drill 0.6 pad 1.27)
  Top 0.61: V1.2 v141.91,54.18
  Bottom 0.305: CON_ENCODER1.4 141.91,95.46
  Bottom 0.406: 141.91,95.46 v141.91,54.18 147.62,48.47 153.34,48.47 V4.1
  Bottom 0.61: v141.91,54.18 141.91,54.82
LIM_3
  Bottom 0.305: CON_ENCODER1.7 135.56,102.44 135.56,95.46
  Bottom 0.406: 135.56,95.46 135.56,93.55 138.73,90.38 138.73,64.98 138.1,64.34 V1.6
LIM_4  (via drill 0.6 pad 1.27)
  Top 0.406: v145.08,59.26 v139.37,59.26 | V1.10 126.67,61.8 126.03,62.44 126.03,68.79 v126.67,69.42
  Top 0.61: v140,85.3 v134.92,85.3
  Bottom 0.305: CON_ENCODER1.6 139.37,95.46 | V1.10 129.84,60.53 138.1,60.53 v139.37,59.26
  Bottom 0.406: 139.37,95.46 139.37,94.19 140.64,92.92 140.64,84.66 v140,85.3 | V4.2 152.07,49.74 148.26,49.74 145.08,52.91 v145.08,59.26 | v126.67,69.42 126.67,75.77 v134.92,85.3
MAX_R1
  Top 0.305: TTL-IN.2 25.42,45.58 IC1.12
MAX_RX
  Bottom 0.305: IC1.13 24.77,42.95 21.35,39.54 18.05,39.54 | X1.3 11.22,40.52 12.08,39.67 RX.TP
  Bottom 0.61: 18.05,39.54 RX.TP
MAX_T1
  Top 0.305: TTL-IN.1 25.42,48.12 IC1.11
MAX_TX
  Bottom 0.305: IC1.14 23.5,40.41 21.73,38.65 21.73,37.25 20.84,36.37 TX.TP 12.59,36.37 11.17,37.78 X1.2
MBED_RX
  Top 0.406: JP_LEFT.7 37.34,85.89 32.27,91.09 30.43,91.09 29.44,90.1 28.81,90.1 TTL-SERIAL.2
  Top 0.61: KIT1.P$14 JP_LEFT.7
MBED_TX
  Top 0.406: JP_LEFT.8 36.1,88.44 31.94,92.6 28.79,92.6 TTL-SERIAL.1
  Top 0.61: KIT1.P$13 JP_LEFT.8
MBED_VOUT
  Top 0.61: KIT1.P$18 JP_LEFT.3
  Bottom 0.305: KIT1.P$18 42.81,75.73 43.32,75.23 43.32,67.1 45.99,64.43 45.99,56.69 48.4,54.02 48.4,37.13 49.16,36.37 49.16,31.78 C5_AOUT.1 48.93,27.75 IC4.3
MCLR
  Bottom 0.813: R12.2 149.9,196.46 JP1.2 JP1.1 149.9,187.57 151.8,185.66 154.34,185.66 U1.1
N$1
  Bottom 0.61: B1.AC1 14.26,129.51 24V.1
N$2
  Bottom 0.61: B1.AC2 7.03,114.21 5.67,115.58 5.67,127.58 7.67,129.57 24V.2
N$3  (1 unrouted)
  Bottom 0.305: R1_DIV.2 68.04,48.99 C1_+24.- 68.07,50.73 64.91,53.64 58.05,53.64 56.4,52.11 56.4,49.32 56.15,49.06 | 53.74,49.25 C2_0V.+ 53.7,49.09 R2_DIV.1 | IC3.3 58.07,37.78 59.2,38.91 59.2,46.02 56.15,49.06 | 56.15,49.06 53.74,49.06 53.61,49.19
N$4  (1 unrouted)
N$5
  Top 0.61: KIT1.VU JP_RIGHT.2
N$6  (1 unrouted)
N$7
  Top 0.61: KIT1.IF- JP_RIGHT.3
N$8
  Bottom 0.305: R_REF.1 39.33,28.26 41.32,26.27 41.32,22.8 OFFSET.E
N$9
  Bottom 0.305: IC4.1 57.97,27.48 R3_G.1 R1_G.1
N$10  (1 unrouted)
  Top 0.305: R3_G.2 R1_G.2 62.96,19.93 63.64,20.62 63.64,26.84 64.41,27.6 65.67,27.6
  Top 0.406: GANANCIA.E 70.37,26.2 68.98,27.6 65.67,27.6
N$11
  Top 0.406: R2_G.2 69.69,19.93 GANANCIA.A GANANCIA.S
  Bottom 0.305: IC4.8 53.74,19.6 55.01,18.33 64.91,18.33 65.67,19.09 65.67,19.93 R2_G.2
N$12
  Bottom 0.61: D1_INPUT.A 16.82,90.67 ON/OFF.P3 ON/OFF.P4
N$13
  Bottom 0.406: RA1.1 116.51,30.05 115.24,31.32 | 115.24,31.32 RA2.2 | D1.A 119.05,35.13 115.24,31.32
N$14
  Top 0.61: KIT1.IF+ JP_RIGHT.4
N$15
  Bottom 0.305: OFFSET.S 38.75,21.24 40.12,19.88 46.1,19.88 IC4.5
N$16
  Top 0.61: KIT1.P$30 JP_RIGHT.11
N$18
  Bottom 0.61: 9VDC.1 13.2,91.33 14.37,92.5 14.37,94.97 ON/OFF.P2 ON/OFF.P5
N$20  (1 unrouted)
  Top 0.305: R_SON.2 24.26,106.71 25.29,107.74 27.83,107.74 28.59,108.5 28.59,109.77 28.84,110.03
N$21
  Bottom 0.61: IC2.1 15.43,71.21 16.91,72.69 16.91,75.23 | 16.91,75.23 16.91,80.04 D1_INPUT.C | C1_9V.+ 18.29,76.61 16.91,75.23
N$24
  Top 0.305: CONFIG.6 70.45,62.06 72.28,60.24 87.77,60.24 93.11,54.91 96.62,54.91 ETH.K
N$25  (1 unrouted)
  Top 0.305: CONFIG.5 87.47,59.52 93.36,53.64 93.36,49.57 96.66,46.27
N$26
  Top 0.305: CONFIG.4 70.55,56.98 72.28,58.72 87.01,58.72 92.6,53.13 92.6,41.19 PC.K
N$28
  cutout Bottom: 73.42,75.96 73.42,83.14 arc-90 73.74,83.46 80.92,83.46 80.92,76.28 arc-90 80.6,75.96
N$29
  cutout Bottom (isolate 0.406): 76.6,45.87 78.5,45.87 arc90 78.88,46.25 78.88,70.1 arc90 78.48,70.5 76.62,70.5 arc90 76.22,70.1 76.21,67.01 arc-90 75.89,66.69 73.42,66.69 arc93 73.04,66.31 73.17,48.91 arc90 73.55,48.53 75.83,48.53 arc-90 76.22,48.15 76.22,46.25 arc90
N$30
  cutout Top: 90.15,33.55 74.34,33.55 arc-90 73.93,33.96 73.93,35.32 arc-90 74.44,35.83 90.16,35.83 arc-90 90.69,35.29 90.69,34.09 arc-90
N$31
  Top 0.61: KIT1.D- JP_RIGHT.9
N$32
  Top 0.61: KIT1.D+ JP_RIGHT.10
N$33
  Bottom 0.305: IC1.1 34.29,35.33 35.45,36.49 38.12,36.49 38.75,35.86 C1_MAX.+
N$34
  Bottom 0.305: IC1.3 34.32,40.41 35.07,39.67 35.07,37.63 35.45,37.25 36.35,37.24 38.07,37.24 C1_MAX.-
N$35
  Bottom 0.305: IC1.5 37.47,45.49 C2_MAX.-
N$36
  Bottom 0.305: C2_MAX.+ 38.23,41.71 36.97,42.97 33.14,42.97 IC1.4
N$37
  Bottom 0.305: C4_MAX.+ 30.5,37 31.39,37.89 33.11,37.89 IC1.2
N$38
  Bottom 0.305: IC1.6 38.17,48.03 C3_MAX.-
N$39
  cutout Top: 78.31,14.31 78.31,18.24 arc-90 78.82,18.88 94.69,18.88 arc-90 95.46,17.86 95.46,16.46 arc90 95.84,15.96 98,15.96 arc-90 98.38,15.58 98.38,14.18 arc-90 98,13.8 78.69,13.8 arc-90
N$40
  cutout Bottom: 51.32,77.08 53.61,77.08 arc90 53.99,77.54 53.99,113.33 arc90 53.61,113.71 51.34,113.71 arc90 50.94,113.41 50.94,77.59 arc90
N$41
  cutout Top: 4.59,76.34 12.34,76.34 arc90 12.97,77.11 12.97,78.38 arc90 12.34,79.01 4.59,79.01 arc90 4.08,78.5 4.08,76.85 arc90
N$42
  cutout Top: 45.1,93.11 45.1,95.78 arc-90 45.48,96.16 61.87,96.16 arc-90 62.37,95.65 62.37,92.98 arc-90 61.87,92.47 57.42,92.47 arc90 57.04,92.09 57.04,90.57 arc-90 56.53,90.06 49.29,90.06 arc-90 48.78,90.57 48.78,92.09 arc90 48.4,92.47 45.74,92.47 arc-90
N$43
  cutout Top: 3.19,124.1 3.19,133.5 arc-90 3.83,134.13 5.22,134.13 arc-90 6.11,133.24 6.11,123.97 arc-90 5.48,123.33 3.95,123.33 arc-90
N$44
  Bottom 0.406: RB1.1 133.02,29.42 131.11,31.32 | 131.11,31.32 RB2.2 | D2.A 133.02,33.23 131.11,31.32
N$45
  Bottom 1.016: RB1.2 125.4,17.1 B.P$1
N$46
  Bottom 0.305: R1.2 91.36,26.75 90.31,25.7 90.31,5.12 88.28,3.09 7.76,3.09 5.99,4.87 5.99,19.86 7.25,21.12 8.77,21.12 U$1.PAAMA
N$47
  Bottom 1.016: RA1.2 108.89,16.84 A.P$1
N$48
  Top 0.61: KIT1.VB JP_LEFT.18
N$49
  Top 0.61: KIT1.NR JP_LEFT.17
N$50
  Top 0.61: KIT1.P$5 JP_LEFT.16
N$51
  Bottom 1.016: Z.P$1 144.45,15.45 138.1,21.8 RZ1.2
N$52
  Bottom 0.305: R2.2 91.08,29.76 89.55,28.24 89.55,5.63 87.77,3.85 8.27,3.85 6.75,5.38 6.75,9.7 7.76,10.71 U$1.PAV
N$53
  Top 0.61: KIT1.P$11 JP_LEFT.10
N$54
  Top 0.61: KIT1.P$12 JP_LEFT.9
N$55
  Bottom 0.406: RZ1.1 145.72,29.42 143.81,31.32 | 143.81,31.32 RZ2.2 | D3.A 148.89,36.4 143.81,31.32
N$56
  Bottom 0.406: Q1.2 R7.2
N$57
  Bottom 0.406: R5.2 159.69,90.38 158.42,91.65 153.97,91.65 153.34,92.28 ERROR_POSICION.A
N$58
  Bottom 0.406: R6.1 113.97,91.01 ALARMA.A
N$59
  Top 0.61: KIT1.P$19 JP_LEFT.2
N$60
  Top 0.61: KIT1.P$20 JP_LEFT.1
N$61
  Bottom 0.305: POWER.A 91.4,61.7 90.31,62.78 90.31,78.27 PWR_LED_R.2
N$62
  cutout Bottom: 102.92,2.11 102.92,23.7 150.8,23.7 152.07,24.97 152.07,47.2 155.24,50.37 171.37,49.74 171.37,2.11
N$63
  cutout Top: 166.3,80.22 167.81,80.22 arc-90 168.83,79.19 168.83,59.01 arc-90 167.82,57.99 166.29,57.99 arc-90 165.4,58.88 165.4,79.32 arc-90
N$64
  cutout Top: 108,58.25 108,78.06 arc-90 108.51,78.57 110.54,78.57 arc-90 111.05,78.06 111.05,58.25 arc-90 110.54,57.74 108.51,57.74 arc-90
N$65
  cutout Top: 130.48,107.39 145.21,107.39 arc90 145.72,107.9 145.72,109.17 arc90 144.96,109.94 130.48,109.94 arc90 129.97,109.43 129.97,107.9 arc90
N$66
  pour Top (isolate 0.813, rank 3): 23.27,136.06 101.89,136.31 101.89,219.88 23.27,219.62
N$67
  pour Top: 37.63,176.44 arc-90 45.25,168.82 arc-90 37.63,161.2 arc-90 30.01,168.82 arc-90
N$68
  pour Top: 37.63,156.5 arc-90 45.25,148.88 arc-90 37.63,141.26 arc-90 30.01,148.88 arc-90
N$69
  pour Top: 65.64,156.4 arc-90 73.26,148.78 arc-90 65.64,141.16 arc-90 58.02,148.78 arc-90
N$70
  pour Top: 85.63,156.38 arc-90 93.25,148.75 arc-90 85.63,141.13 arc-90 78.01,148.75 arc-90
N$71
  pour Top: 65.69,176.44 arc-90 73.31,168.82 arc-90 65.69,161.2 arc-90 58.07,168.82 arc-90
N$72
  pour Top: 85.63,176.44 arc-90 93.25,168.82 arc-90 85.63,161.2 arc-90 78.01,168.82 arc-90
N$73
  pour Top: 65.69,196.51 arc-90 73.31,188.89 arc-90 65.69,181.27 arc-90 58.07,188.89 arc-90
N$74
  pour Top: 85.63,196.51 arc-90 93.25,188.89 arc-90 85.63,181.27 arc-90 78.01,188.89 arc-90
N$75
  pour Top: 65.69,216.45 arc-90 73.31,208.83 arc-90 65.69,201.21 arc-90 58.07,208.83 arc-90
N$76
  pour Top: 85.38,216.45 arc-90 93,208.83 arc-90 85.38,201.21 arc-90 77.76,208.83 arc-90
N$77
  cutout Top: 47.28,209.72 47.28,186.35 arc90 48.04,185.59 49.82,185.59 arc90 50.58,186.35 50.58,209.46 arc90 49.31,210.73 48.29,210.73 arc90
N$78
  cutout Top (isolate 0.254): 31.14,206.79 29.89,206.79 arc90 28.99,205.9 28.99,191.58 arc90 30.16,190.41 30.51,190.41 arc90 31.91,191.81 31.91,206.02 arc90
N$79
  Bottom 0.813: C8.1 128.31,134.86 128.94,135.5 IC5.5
N$80
  Bottom 0.813: R18.2 132.75,138.04 IC5.6 IC5.7 C9.+
N$81
  Bottom 0.813: IC5.3 125.13,138.04 126.4,139.31 126.4,142.48 128.31,144.39 128.31,148.2 127.04,149.47 R19.2
N$82  (via drill 0.6 pad 1.78)
  Top 0.813: v166.73,157.09 166.73,157.72 168.95,159.94 168.95,165.98 v167.04,167.88
  Bottom 0.813: R19.1 138.79,149.47 147.04,141.21 161.65,141.21 166.73,146.29 v166.73,157.09 | v167.04,167.88 166.41,167.25 U1.21
N$83
  Bottom 0.813: SENSE.2 SENSE.1 113.7,135.5 118.78,140.58 IC5.2
N$84
  Bottom 0.813: U1.13 R16.2
N$85
  Bottom 0.813: R16.1 Q2.1
N$86
  Bottom 0.813: U1.12 R17.2
N$87
  Bottom 0.813: R17.1 144.82,160.26 139.74,165.34 Q3.1
N$88
  Bottom 0.813: U1.23 164.5,172.33 165.77,173.6 165.77,201.54 INTERRUPCION.2
N$89
  Bottom 0.813: U1.2 144.82,182.49 130.85,196.46 ADC_123.1
N$90
  Bottom 0.813: U1.3 144.18,179.95 132.75,191.38 ADC_123.2
N$91
  Bottom 0.813: U1.4 143.55,177.41 134.66,186.3 ADC_123.3
N$92
  Bottom 0.813: U1.9 153.58,164.71 Q4.2 149.77,168.39 148.63,167.25 C10.1
N$93
  Bottom 0.813: U1.10 151.3,162.17 Q4.1 149.9,163.44 148.63,162.17 C11.1
N$94
  Bottom 0.813: U1.22 165.14,169.79 167.68,172.33 167.68,204.71 INTERRUPCION.1
N$95
  Bottom 0.813: R20.2 148.63,120.26 LED1.A
N$96
  Top 0.406: INTERRUPCION.3 156.25,202.17 161.01,197.41 165.14,197.41 166.73,195.82 166.73,177.09 164.5,174.87 U1.24 162.28,174.87
N$97
  cutout Bottom: 147.04,205.98 128.31,205.98 arc90 127.99,205.35 127.99,204.08 arc90 128.31,203.44 147.04,203.44 arc90 147.68,204.08 147.68,205.35 arc90
N$98
  cutout Bottom: 146.72,202.49 128.25,202.49 arc90 127.42,201.72 127.42,201.03 arc90 128.31,199.95 146.72,199.95 arc90 147.36,200.58 147.36,201.85 arc90
OPTO_1  (via drill 0.6 pad 1.27)
  Top 0.406: TP5.TP 122.86,75.77 v123.49,76.41 128.57,76.41 131.11,73.87 131.11,54.18 133.65,51.64 V1.1
  Bottom 0.305: R8.1 112.44,82.12 111.68,81.36 111.68,69.93 112.19,69.42 OPTO-ACOPLADOR1.3
  Bottom 0.406: v123.49,76.41 123.49,77.68 122.22,78.95 115.24,78.95 113.97,80.22 R8.1
OPTO_2  (via drill 0.6 pad 1.27)
  Top 0.305: v123.49,68.79 123.49,69.42 122.22,70.69 TP6.TP
  Bottom 0.305: R9.1 111.43,84.66 110.79,84.03 110.79,68.15 112.06,66.88 OPTO-ACOPLADOR1.4 117.14,66.88 119.05,68.79 v123.49,68.79
OPTO_3  (via drill 0.6 pad 1.27)
  Top 0.305: v123.49,65.61 TP7.TP
  Bottom 0.305: R11.1 112.06,51.64 110.79,52.91 110.79,63.07 112.06,64.34 OPTO-ACOPLADOR1.5 122.22,64.34 v123.49,65.61 126.03,63.07 130.48,63.07 131.75,61.8 V1.5
OPTO_4  (via drill 0.6 pad 1.27)
  Top 0.305: v123.49,62.44 122.22,62.44 TP8.TP
  Bottom 0.305: R10.1 OPTO-ACOPLADOR1.6 122.86,61.8 v123.49,62.44
  Bottom 0.406: V1.11 126.67,59.26 v123.49,62.44
PH_A  (via drill 0.6 pad 1.02)
  Top 0.254: CON_ENCODER.15 91.56,128.01
  Top 0.305: 91.56,128.01 88.53,124.99 55.39,124.99 v49.93,119.53
  Bottom 0.305: v49.93,119.53 49.93,70.12 55.54,64.51 QED.2
PH_A1
  Bottom 0.406: D1.C 108.89,40.21 RA3.2 106.98,44.66 106.98,101.43 110.54,104.98 124.13,104.98 125.4,103.71 CON_ENCODER1.15
PH_B  (via drill 0.6 pad 1.02)
  Top 0.254: CON_ENCODER.12 86.36,130.55 85.23,129.43 85.23,126.51
  Top 0.305: 85.23,126.51 84.34,125.62 54.12,125.62 48.53,120.03 v48.53,117.75
  Bottom 0.305: v48.53,117.75 48.53,68.72 52.81,64.45 QED.1
PH_B1  (via drill 0.6 pad 1.27)
  Top 0.305: CON_ENCODER1.12 130.48,99.9 125.4,99.9 v122.86,102.44
  Bottom 0.305: 110.16,103.08 122.22,103.08 v122.86,102.44
  Bottom 0.406: D2.C 122.86,40.21 RB3.2 123.49,41.48 120.95,44.02 110.16,44.02 108.25,45.93 108.25,101.17 110.16,103.08
PULS+  (via drill 0.6)
  Top 0.305: v26.56,115.11 v26.56,117.64
  Top 0.61: JP_LEFT.15 KIT1.P$6
  Bottom 0.305: JP_LEFT.15 37.48,106.22 35.2,108.5 32.66,108.5 32.15,107.99 26.05,107.99 25.54,108.5 25.54,114.09 v26.56,115.11 | v26.56,117.64 26.56,120.19 29.1,122.72 29.1,126.9 30.11,127.92 CON_DRIVER.3
PULS+1
  Bottom 0.61: CON_DRIVER1.3 32.11,202.35 29.65,204.81 29.65,211.25 37.22,218.82 89.11,218.82 94.65,213.28 94.65,192.81 90.65,188.81 PULS+.BANANA$1
PULS-
  Bottom 0.61: CON_DRIVER1.4 46.11,202.35 48.57,199.81 63.65,199.81 65.65,197.81 PULS-.BANANA$1
PWM_AZUL
  Bottom 0.813: Q3.3 135.29,172.33 131.48,176.14 111.8,176.14 108.62,172.96 AZUL.1 AZUL.2 AZUL.3
PWM_ROJO
  Bottom 0.813: Q2.3 135.29,159.63 131.48,163.44 117.51,163.44 116.24,162.17 116.24,155.18 113.07,152.01 ROJO.1 ROJO.2 ROJO.3
RB6
  Bottom 0.813: JP1.10 JP1.9 160.06,183.12 160.69,182.49 U1.27
RB7
  Bottom 0.813: U1.28 162.6,193.6 160.69,195.5 159.42,195.5 157.52,193.6 JP1.8 JP1.7
RD+  (via drill 0.6)
  Top 0.305: v49.16,7.16 v61.87,7.16
  Top 0.61: KIT1.RD+ JP_RIGHT.6
  Bottom 0.305: U$1.P1 21.61,8.81 23.26,7.16 v49.16,7.16 49.42,7.41 49.42,11.98 50.94,13.51 RD+.TP | KIT1.RD+ 67.96,106.22 69.74,107.99 86.5,107.99 87.27,107.23 87.27,9.95 85.74,8.43 63.13,8.43 v61.87,7.16
RD-  (via drill 0.6)
  Top 0.305: v47.13,9.19 v59.83,9.19
  Top 0.61: KIT1.RD- JP_RIGHT.5
  Bottom 0.254: 63.13,6.65 62.63,6.14 60.85,6.14 60.59,6.39 60.59,8.43 v59.83,9.19
  Bottom 0.305: U$1.P3 23.23,12.52 23.77,11.98 23.77,9.95 24.53,9.19 46.37,9.19 | 46.37,9.19 v47.13,9.19 | RD-.TP 48.4,14.27 46.37,12.23 46.37,9.19 | KIT1.RD- 87.01,108.75 88.03,107.74 88.03,9.44 86,7.41 63.9,7.41 63.13,6.65
S$1
  cutout Top: 109.52,23.27 109.52,23.52 arc90 108.81,24.18 106.4,24.18 arc90 105.66,23.5 105.51,23.19 109.45,23.19
S$2
  cutout Top: 44.32,68.96 62.61,68.96 arc90 62.87,69.22 62.87,70.48 arc90 62.61,70.74 44.2,70.74 arc90 43.94,70.48 43.94,69.34 arc90
SCL  (via drill 0.6)
  Top 0.305: R3.1 82.3,85.48 82.04,85.75 67.21,85.74 JP_RIGHT.14 | v81.68,103.67 v81.68,113.58
  Top 0.61: KIT1.P$27 JP_RIGHT.14
  Bottom 0.305: v81.68,113.58 81.68,114.85 82.19,115.36 97.17,115.36 98.44,116.63 98.44,132.12 97.17,133.39 82.44,133.39 81.42,132.38 81.42,130.59 CON_ENCODER.8 | v81.68,103.67 81.68,95.29 84.09,92.88 84.09,86.53 83.05,85.48
  Bottom 0.406: R3.1 83.05,85.48
SDA  (via drill 0.6)
  Top 0.305: R4.1 67.14,88.52 JP_RIGHT.13 | v79.9,103.67 v79.9,113.58
  Top 0.61: KIT1.P$28 JP_RIGHT.13
  Bottom 0.305: v79.9,113.58 79.9,112.31 79.39,111.8 72.79,111.8 72.28,112.31 72.28,120.19 73.68,121.45 73.68,123.87 76.09,126.28 78.38,126.28 78.88,126.79 78.88,127.97 CON_ENCODER.5 | R4.1 82.45,92.23 79.9,94.78 v79.9,103.67
SERVO_ON  (1 unrouted)
  Top 0.61: R_SON.1 31.89,103.17 36.47,103.17 36.99,103.7 39.24,103.7 39.26,103.67 | KIT1.P$7 JP_LEFT.14
SIGN+
  Top 0.61: KIT1.P$26 JP_RIGHT.15
  Bottom 0.203: 39.13,126.03 36.85,126.03 36.34,126.53 36.34,128.82 35.83,129.33 32.91,129.33 32.53,128.95 32.53,128.04 CON_DRIVER.5
  Bottom 0.305: KIT1.P$26 61.87,83.36 60.85,84.37 60.85,120.44 59.33,121.96 43.07,121.96 39.13,126.03
SIGN+1
  Bottom 0.61: CON_DRIVER1.5 27.15,199.81 25.15,197.81 25.15,146.87 33.7,138.31 90.15,138.31 95.16,143.32 95.16,164.29 90.65,168.81 SIGN+.BANANA$1
SIGN-
  Bottom 0.61: CON_DRIVER1.6 45.65,199.81 53.65,191.81 53.65,170.81 55.65,168.81 SIGN-.BANANA$1
SON
  Bottom 0.305: OK1.5 19.24,112.23 18.94,111.93 6.62,111.93 3.95,114.6 3.95,129.46 6.75,132.25 26.69,132.25 27.57,131.36 27.57,130.63 CON_DRIVER.2
SON1
  Bottom 0.61: CON_DRIVER1.2 45.57,204.89 45.65,204.81 61.65,204.81 SON.BANANA$1
SON_ON  (via drill 0.6 pad 1.02)
  Top 0.305: v47.39,125.49 v47.39,120.67
  Bottom 0.254: CON_ENCODER.3 76.3,128.33 75.33,129.3 72.53,129.3
  Bottom 0.305: 72.53,129.3 69.74,129.3 68.6,130.45 48.15,130.45 46.75,129.05 46.75,126.13 v47.39,125.49 | v47.39,120.67 43.2,120.67 38.62,125.24 33.42,125.24 32.02,123.84 32.02,113.68 30.62,112.29 28.73,112.29 OK1.2
SON_ON1  (via drill 0.6 pad 1.27)
  Top 0.406: v146.35,82.12 v140.64,82.12
  Bottom 0.406: CON_ENCODER1.3 143.18,102.44 143.18,98.63 146.35,95.46 v146.35,82.12 | v140.64,82.12 140.64,57.99 140,57.36 138.73,57.36 138.1,57.99 129.84,57.99 V1.12
TD+  (via drill 0.6)
  Top 0.305: v50.94,5.38 v63.64,5.38
  Top 0.61: KIT1.TD+ JP_RIGHT.8
  Bottom 0.305: U$1.P6 17.95,16.33 16.91,15.28 16.91,9.19 20.72,5.38 v50.94,5.38 50.94,11.22 53.61,13.89 TD+.TP | KIT1.TD+ 69.48,101.14 70.25,101.9 70.25,105.71 71.01,106.47 84.98,106.47 85.74,105.71 85.74,11.22 84.98,10.46 63.39,10.46 61.36,12.49 56.53,12.49 55.77,11.73 55.77,7.41 57.8,5.38 v63.64,5.38
TD-  (via drill 0.6)
  Top 0.305: v45.1,11.22 v57.8,11.22
  Top 0.61: KIT1.TD- JP_RIGHT.7
  Bottom 0.305: U$1.P8 19.07,19.98 19.95,20.87 26.05,20.87 27.07,19.86 27.07,11.98 27.83,11.22 43.58,11.22 | 43.58,11.22 v45.1,11.22 | TD-.TP 45.86,14.27 43.58,11.98 43.58,11.22 | KIT1.TD- 68.98,103.67 69.48,104.18 69.48,106.47 70.25,107.23 85.74,107.23 86.5,106.47 86.5,10.71 85.23,9.44 63.13,9.44 61.36,11.22 v57.8,11.22
VCC  (via drill 0.6)
  Top 0.305: KIT1.VIN 42.56,116.38 43.32,117.14 43.32,122.47 v44.85,123.87 | R3.2 90.31,85.74 89.55,84.98 89.55,81.58 88.79,80.81 84.55,80.81 83.38,79.67 PWR_LED_R.1 83.3,78.95
  Top 0.406: v29.1,59.73 29.1,65.55 30.62,67.07 81.93,67.07 83.33,68.47 83.33,78.12 83.3,78.15 83.3,78.95
  Top 0.61: KIT1.VIN JP_LEFT.19
  Bottom 0.305: R16_ALM.2 33.93,117.38 34.69,116.63 38.86,116.63 JP_LEFT.19 | IC1.16 27.59,35.33 28.08,34.84 | 28.08,34.84 28.08,30.55 C4_MAX.- | C2_9V.+ 28.01,60.82 v29.1,59.73 29.1,35.86 28.08,34.84 | 89.55,53.64 89.55,85.13 90.16,85.74 R3.2 90.07,86.86 R4.2 90.03,88.44 90.31,88.69 89.55,89.45 89.55,108.25 87.52,110.28 71.26,110.28 70.75,110.79 70.75,118.92 68.98,120.69 62.37,120.69 59.58,123.49 45.48,123.49 v44.85,123.87 44.47,123.74 44.09,123.74 41.29,126.53 41.29,130.34 42.31,131.36 68.72,131.36 69.53,130.55 CON_ENCODER.2 | 89.55,53.64 89.55,44.75 | 89.55,44.75 89.55,35.6 90.57,34.59 96.63,34.59 PC.A | BAUD.A 90.57,43.73 89.55,44.75 | ETH.A 90.84,52.34 89.55,53.64
  Bottom 0.61: IC2.3 15.34,66.13 16.91,64.56 16.91,61.51 17.92,60.49 22.85,60.49 C2_9V.+
VCC1  (via drill 0.6 pad 1.27)
  Top 0.406: CON_ENCODER1.2 150.8,101.17 TP1.TP | OPTO-ACOPLADOR1.1 113.97,78.31 115.87,80.22 119.68,80.22 R8.2
  Top 0.61: v143.18,48.47 145.72,48.47 V4.14 150.8,51.64 153.34,54.18 153.34,68.79 C5.1 | 150.8,101.17 150.8,85.3 | R5.1 155.88,75.77 150.8,80.85 150.8,85.3 | 150.8,85.3 148.89,87.2 v134.92,87.2
  Bottom 0.305: R9.2 R8.2
  Bottom 0.61: R10.2 R11.2 V1.14 130.48,51.64 133.65,48.47 v143.18,48.47 | R5.1 155.88,75.77 154.61,74.5 C5.1 | C4.1 133.65,78.95 136.83,82.12 136.83,86.57 136.19,87.2 v134.92,87.2 133.65,87.2 131.11,84.66 R9.2
VCC2  (via drill 0.6 pad 1.78)
  Top 0.813: v146.41,123.75 146.09,124.07 139.42,124.07 134.98,128.51 134.98,128.83 v132.75,131.05
  Bottom 0.813: R12.1 153.71,197.73 152.44,196.46 JP1.4 JP1.3 152.44,188.52 153.39,187.57 156.57,187.57 158.47,185.66 158.47,166.93 160.69,164.71 U1.20 C7.1 168.95,162.17 168.95,137.4 163.23,131.69 IC6.3 152.44,128.51 R20.1 143.55,125.97 141.01,124.07 | PWR.2 141.01,124.07 | C6.1 C3.+ 132.75,127.24 v132.75,131.05 | 141.01,124.07 146.09,124.07 v146.41,123.75
VCMD  (via drill 0.6)
  Top 0.305: v83.45,103.67 v83.45,113.58 | CON_DRIVER.10 44.02,130.54 C3_AOUT.1
  Bottom 0.305: IC4.6 48.66,21.38 49.42,22.14 65.93,22.14 68.72,24.93 84.22,24.93 84.98,25.7 84.98,102.91 84.22,103.67 v83.45,103.67 | v83.45,113.58 83.45,111.55 82.82,110.91 72.15,110.91 71.52,111.55 71.52,119.55 69.48,121.58 62.63,121.58 59.96,124.25 46.24,124.25 45.35,125.14 43.83,125.14 42.05,126.92 42.05,129.28 42.81,130.04 C3_AOUT.1
VCMD1
  Bottom 0.61: CON_DRIVER1.10 44.73,194.73 49.65,189.81 49.65,170.81 47.65,168.81 VCMD.BANANA$1
VDD
  Top 0.406: CON_ENCODER1.13 129.21,105.62 127.94,106.89 119.68,106.89 TP3.TP
  Bottom 0.813: C1.- 164.13,27.51 169.35,32.73 169.34,46.82 167.82,48.34 167.94,97.36 156.51,108.79 131.75,108.79 129.21,106.25 CON_ENCODER1.13
  Bottom 1.016: 24.P$1 161.72,14.81 159.69,16.84 C1.-
VDD1
  Bottom 0.813: IC6.1 147.36,131.05 146.72,130.42 141.01,130.42 C2.+ 139.74,136.77 142.28,139.31 142.28,141.85 139.74,144.39 R18.1 132.12,144.39 IC5.8 129.58,143.12 128.31,141.85 128.31,137.4 126.4,135.5 IC5.4 119.42,135.5 118.15,134.23 12V.3 12V.2 12V.1
(copper drawn outside any net)
  shapes: Bottom area x943, Top area x15417

## Text on the board
Top: CON_DRIVER | CONECTOR DRIVER | 24 VDC | CON_ENCODER | Powered by | mbed | UTN | Mecatrónica | 9 VDC | mbed NXP LPC1768 | PLACA ENCODER | OPTOACOPLADORES | 0V | Mecatrónica | A | B | Z | +24V | Diseñado por: | Ernesto Palacios
Bottom: Para: Yurimar | 08-09-2013 | De: Ernesto | Ernesto Palacios | CIME - 2013 | mecatronica.mid@gmail.com | CIME - 2013 | Ernesto Palacios
tNames: 5V | POSICIÓN | INVALIDA | ETH | BAUD | PC
Measures: +5V- | +24-